# Altium PCB ESP32_C3.PcbDoc
Units mil, origin at the board's own origin, x right, y up, seen from the top; angles counter-clockwise.
Board outline 3005 x 2225 mil, 2 copper layers (Top Layer, Bottom Layer); 64 components, 42 nets, 260 pads, 0 vias.
Unrouted connection lines stored in the file: 191.
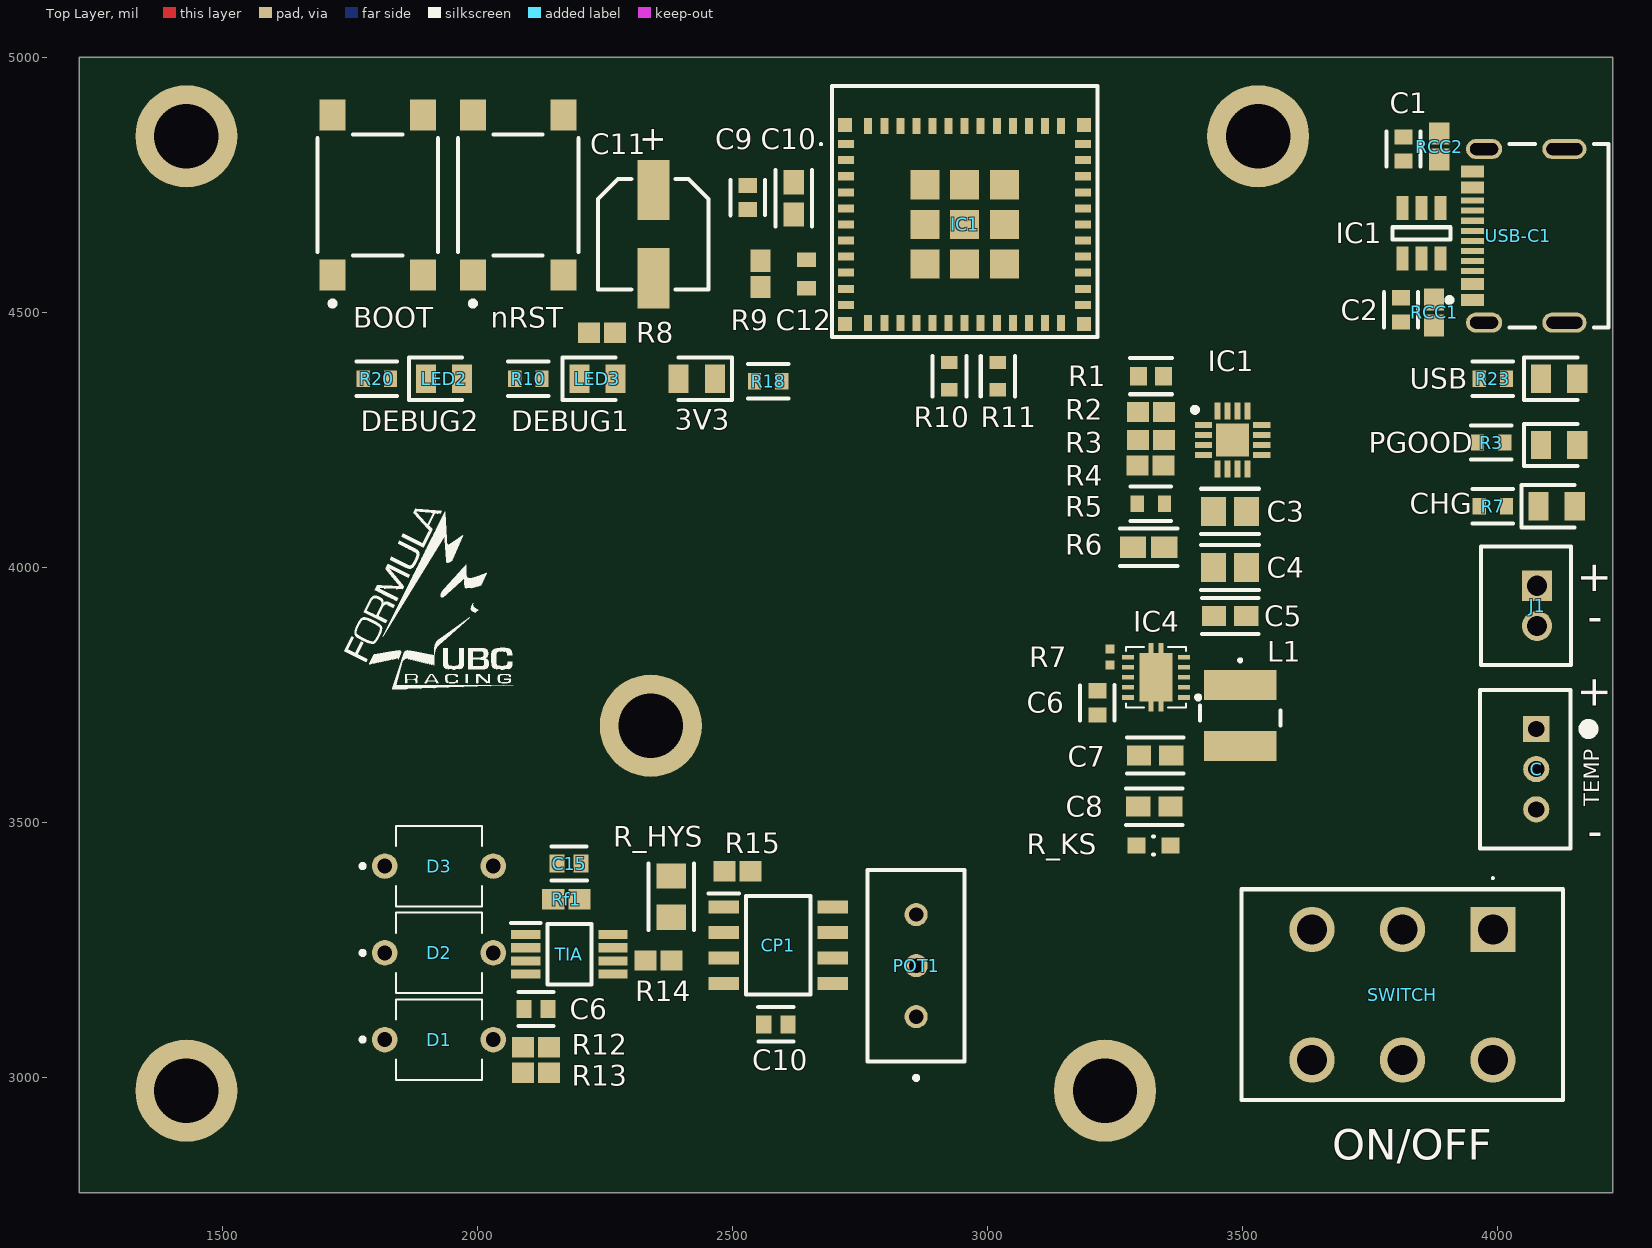
[diagram p0: Top Layer view]
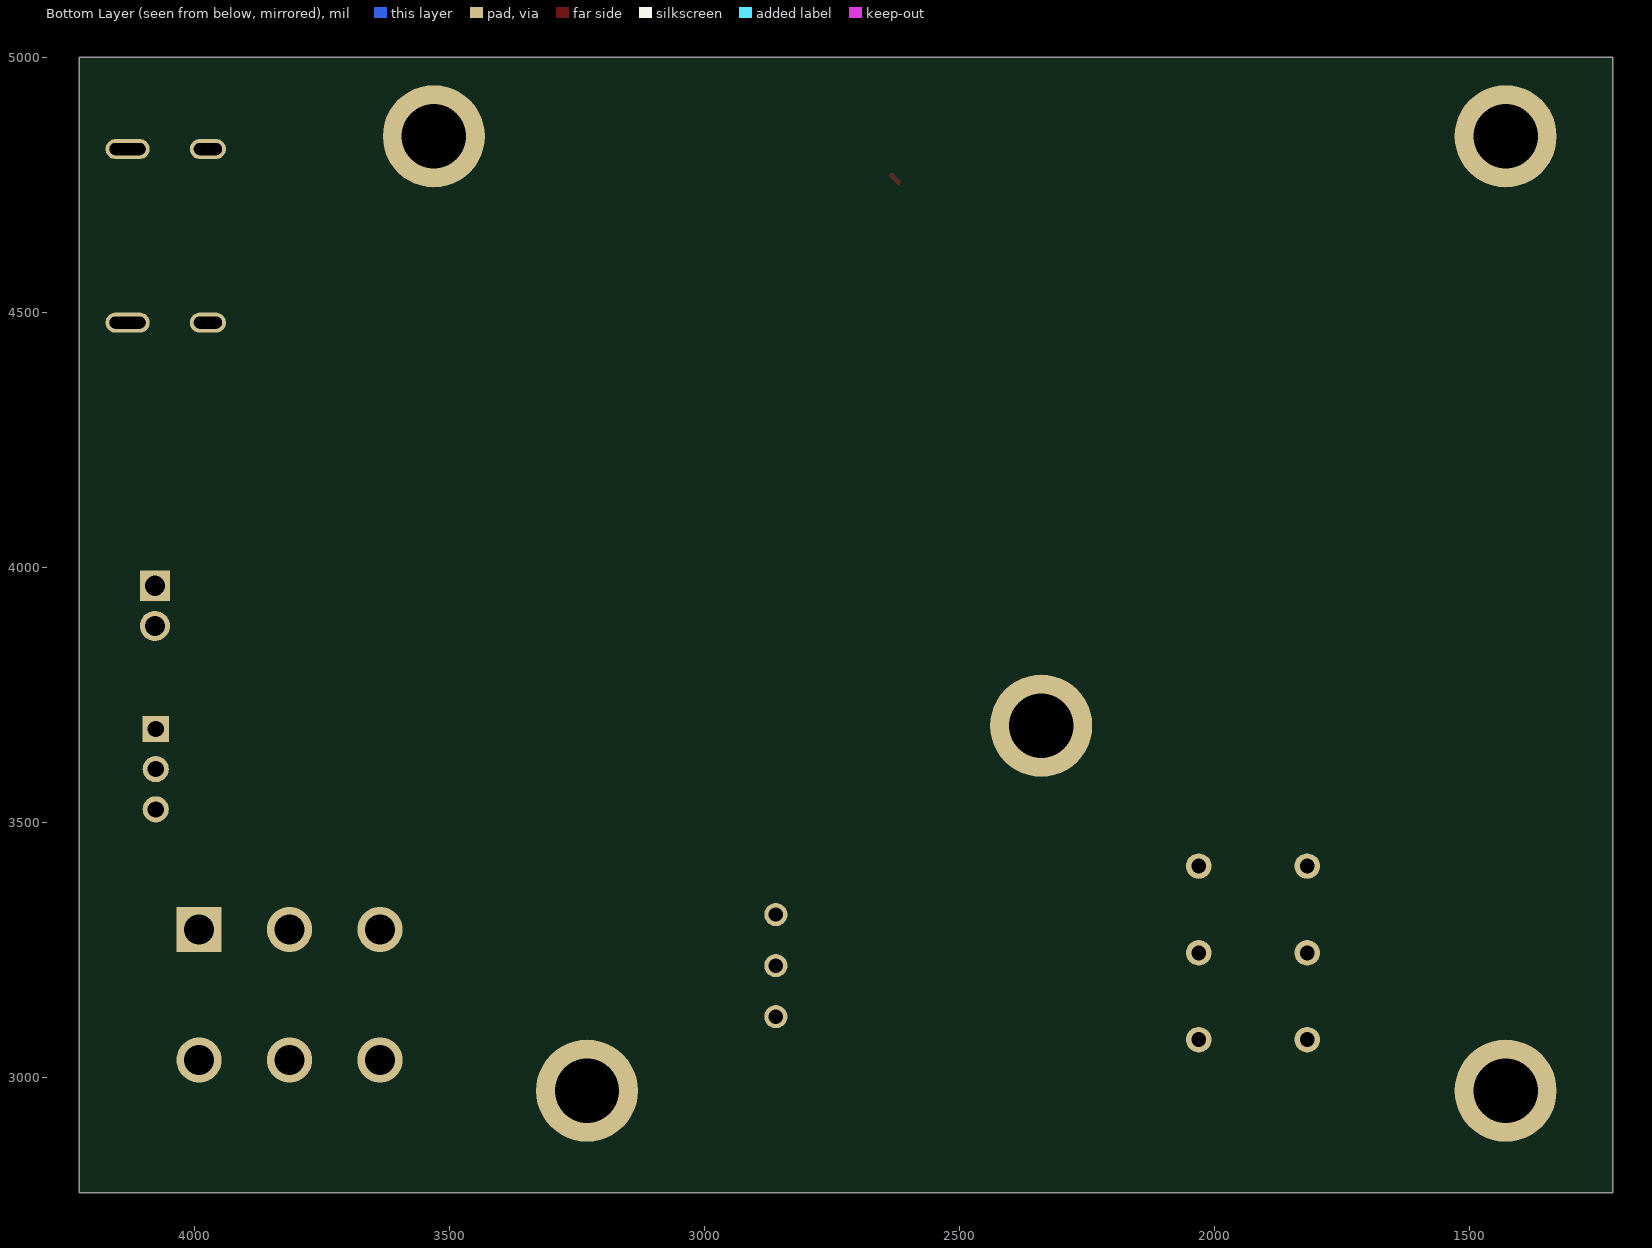
[diagram p1: Bottom Layer view, seen from below]

## Layer stack, top to bottom
Top Solder: solder mask 0.4, Solder Resist, Dk 3.5
Top Layer: signal copper 1.4
Dielectric 1: dielectric 12.6, FR-4, Dk 4.8
Bottom Layer: signal copper 1.4
Bottom Solder: solder mask 0.4, Solder Resist, Dk 3.5

## Board outline
1220,2775 4225,2775 4225,5000 1220,5000

## Design rules (kind name [scope] priority, off if disabled: settings)
Clearance [All] p1: gap=5.98 ignorepadtopadclearanceinfootprint=FALSE
DiffPairsRouting [All] p1: maxlimit=10 minlimit=10 mostfreqgap=10 toplayer_minwidth=15 toplayer_maxwidth=15 toplayer_prefwidth=15 bottomlayer_minwidth=15 bottomlayer_maxwidth=15 bottomlayer_prefwidth=15 maxuncoupledlength=500
PolygonConnect [All] p1: connectstyle=Relief reliefconductorwidth=10 reliefentries=4 polygonreliefangle="90 Angle" airgapwidth=10
RoutingVias [All] p1: holewidth=28 width=50 viastyle="Through Hole" minholewidth=28 minwidth=50 maxholewidth=28 maxwidth=50
SolderMaskExpansion [All] p1: expansion=0 istentingtop=FALSE
SupplyNets "Schematic Supply Nets_5" [InNet('3V3')] p1: voltage=0.000
SupplyNets "Schematic Supply Nets_4" [InNet('5V_USB')] p2: voltage=0.000
SupplyNets "Schematic Supply Nets_3" [InNet('VBAT+')] p3: voltage=0.000
SupplyNets "Schematic Supply Nets_2" [InNet('PWR_EN')] p4: voltage=0.000
SupplyNets "Schematic Supply Nets_1" [InNet('V_SYS')] p5: voltage=0.000
SupplyNets "Schematic Supply Nets" [InNet('GND')] p6: voltage=0.000
Width [All] p1: maxlimit=10 minlimit=10 preferedwidth=10
29 further rules are at their usual default settings.

## Classes and differential pairs
component class "Power Management": 3V3 C C1 C4 C5 C6 C8 C9 C11 C12 CHG IC1 IC4 J1 L1 PGOOD R3 R5 R6 R7 R10 R12 R15 R18 R23 R_KS RCC1 RCC2 RT1 SWITCH USB USB-C1
component class "Laser Receiver AFE": C6 C10 C15 CP1 D1 D2 D3 POT1 R12 R14 R15 R_HYS Rf1 TIA
component class "ESP32-C3 MCU": BOOT C9 C10 C11 C12 IC1 LED2 LED3 nRST R8 R10 R12 R20
differential pair USB_D: +USB_D_P -USB_D_N

## Components (designator, comment, footprint, x,y, rotation, side; value= is the part's Value field where it differs from the comment)
3V3 "LTST-C170GKT" LEDC2012X120N 2430,4370 r180 top (schematic designator LED5)
BOOT "PTS645SM43SMTR92LFS" FP-PTS645SM43SMTR92LFS-MFG 1805,4730 r90 top (schematic designator SW2)
C "B3B-PH-K-S(LF)(SN)" JST-B3B-PH-K-S-3_V 4053.35,3605 r270 top (schematic designator P1)
C1 "0.1uF" FP-C0603C-CF-MFG#1 3815,4820 r90 top value="0.10 μF"
C2 "1uF" FP-C0603C-CF-MFG#1 3810,4505 r90 top value="0.10 μF" (schematic designator C4)
C3 "4.7uF" FP-GCM21B-0_2-e0_2_0_7-IPC_B#1 3475,4110 r0 top (schematic designator C5)
C4 "4.7uF" FP-GCM21B-0_2-e0_2_0_7-IPC_B#2 3475,4000 r0 top (schematic designator C8)
C5 "10uF" FP-GRM188-0_1-e0_2_0_55-IPC_A#1 3475,3905 r0 top (schematic designator C13)
C6 "0.1uF" FP-C0603C-CF-MFG#2 3215,3735 r270 top value="0.10 μF" (schematic designator C14)
C6 "0.1uF" FP-C0603C-CF-MFG#1 2115,3135 r180 top value="0.10 μF"
C7 "10uF" FP-GRM188-0_1-e0_2_0_55-IPC_A#1 3328.28,3631.68 r180 top (schematic designator C12)
C8 "10uF" FP-GRM188-0_1-e0_2_0_55-IPC_A#1 3326.71,3531.68 r180 top (schematic designator C9)
C9 "0.1uF" FP-C0603C-CF-MFG#1 2530,4725 r270 top value="0.10 μF" (schematic designator C3)
C10 "10uF" FP-GRM188-0_1-e0_2_0_55-IPC_A#2 2620,4723.43 r270 top (schematic designator C11)
C10 "0.1uF" FP-C0603C-CF-MFG#1 2585,3105 r0 top value="0.10 μF"
C11 "47uF" WCAP-ASLI_D5H5.5 2345,4653.39 r90 top (schematic designator C7)
C12 "1uF" CAPC1608X90N 2645,4575 r90 top (schematic designator C2)
C15 "22pF" FP-C0603C-CF-MFG#1 2180,3420 r0 top value="22 pF"
CHG "LTST-C170GKT" LEDC2012X120N 4115,4120 r0 top (schematic designator LED4)
CP1 "LM393DR2GH" SOIC127P600X175-8N 2590,3260 r0 top
D1 "BPW34" BPW34 1925,3075 r0 top
D2 "BPW34" BPW34 1925,3245 r0 top
D3 "BPW34" BPW34 1925,3415 r0 top
IC1 "USBLC6-2SC6" SOT95P280X145-6N 3850,4655 r270 top (schematic designator IC3)
IC1 "BQ24074RGTR" QFN50P300X300X100-17N-D 3480,4250 r0 top (schematic designator IC2)
IC1 "ESP32-C3-MINI-1U-H4" ESP32C3MINI1UH4 2955,4672.24 r0 top
IC4 "TPS63001DRCR" TPS74901DRCR 3330,3785 r180 top
J1 "B2B-PH-K-S(LF)(SN)" JST-B2B-PH-K-S_V 4055,3925 r270 top
L1 "2.2uH" SRN40262R2Y 3495,3710.04 r270 top
LED2 "LTST-C170GKT" LEDC2012X120N 1935,4370 r0 top
LED3 "LTST-C170GKT" LEDC2012X120N 2235.43,4370 r0 top
nRST "PTS645SM43SMTR92LFS" FP-PTS645SM43SMTR92LFS-MFG 2080,4730 r90 top (schematic designator SW1)
PGOOD "LTST-C170GKT" LEDC2012X120N 4120,4240 r0 top (schematic designator LED1)
POT1 "3296W-1-104LF" 3296W1503LF 2860,3120 r270 top
R1 "1K5" FP-RG1608-IPC_C 3320,4375 r0 top (schematic designator R15)
R2 "46K4" RESC1608X55N#1 3320,4305 r180 top (schematic designator R12)
R3 "3K" RESC1608X55N#1 3320,4250 r180 top (schematic designator R16)
R3 "1K" FP-RC0603-0_55-IPC_C#1 3986.64,4245 r0 top
R4 "1K8" RESC1608X55N#2 3319.41,4200 r180 top (schematic designator R17)
R5 "10K" FP-RC0603-0_55-IPC_C#1 3320,4125 r180 top (schematic designator R14)
R6 "NCP18XH103F03RB" FP-NCP18-0_15-IPC_A 3315.55,4040 r180 top (schematic designator R22)
R7 "100R" RESC1005X40X25LL05T05 3240,3825 r90 top (schematic designator R19)
R7 "1K" FP-RC0603-0_55-IPC_C#1 3990,4120 r0 top
R8 "10kΩ" RESC1608X55N#1 2244.41,4460 r0 top
R9 "10kΩ" RESC1608X55N#1 2555,4575.59 r90 top (schematic designator R1)
R10 "1K" FP-RC0603-0_55-IPC_C#1 2100,4370 r0 top
R10 "10K" FP-RC0603-0_55-IPC_C#2 2925,4375 r90 top (schematic designator R2)
R11 "10K" FP-RC0603-0_55-IPC_C#1 3020,4375 r90 top (schematic designator R9)
R12 "10k" RESC1608X55N#3 2115,3060 r0 top (schematic designator R11)
R13 "10k" RESC1608X55N#4 2115,3010 r0 top (schematic designator Ro1)
R14 "10k" RESC1608X55N#5 2355,3230 r0 top (schematic designator R13)
R15 "10k" RESC1608X55N#6 2510,3405 r0 top (schematic designator R4)
R18 "1K" FP-RC0603-0_55-IPC_C#1 2570,4365 r180 top
R20 "1K" FP-RC0603-0_55-IPC_C#1 1803.36,4370 r180 top
R23 "1K" FP-RC0603-0_55-IPC_C#1 3990,4370 r0 top
R_HYS "1M" FP-RK73H2A-IPC_A 2380,3355 r90 top
R_KS "100K" FP-RC0603-0_55-MFG 3325,3455 r180 top
RCC1 "5.1kΩ" RESC1608X55N#1 3875,4500 r270 top
RCC2 "5.1kΩ" RESC1608X55N#1 3885,4825 r90 top
Rf1 "10k" RESC1608X55N#1 2174.41,3350 r0 top
SWITCH "SLW-1678105-6A-N-D" SLW16781056AND 3990,3290.91 r180 top
TIA "OPA380AIDGKR" SOP65P490X110-8N 2180.63,3242.2 r0 top
USB "LTST-C170GKT" LEDC2012X120N 4120,4370 r0 top (schematic designator LED6)
USB-C1 "217179-0001" FP-2171790001-MFG 4085,4650 r90 top

## Footprints (in the part's own frame and the unit in brackets; to place one, negate y for a bottom-side part, rotate by r counter-clockwise, add the part's x,y. Pads: shape width x height; smd on the part's side, far side on the other; paste and mask are expansions set on the pad)
3296W1503LF [mm]
  round 1.15 hole 0.71: 1(0,0) 2(-2.54,0) 3(-5.08,0)
  silkscreen extent -7.3,-2.42 3.15,2.41, body extent -7.3,-2.41 2.22,2.41, height 11.54
BPW34 [mm]
  round 1.269 hole 0.74: 1(-2.7,0) 2(2.7,0)
  silkscreen extent -3.9,-2 2.15,2, body extent -2.77,-1.99 2.89,1.99, height 2.34
CAPC1608X90N [mm]
  rect 0.73x0.94 smd: 2(0.71,0) C12(-0.71,0)
  body extent -0.8,-0.4 0.8,0.4, height 0.9
ESP32C3MINI1UH4 [mm]
  rect 0.8x0.4 smd: 1(-5.9,4) 2(-5.9,3.2) 3(-5.9,2.4) 4(-5.9,1.6) 5(-5.9,0.8) 6(-5.9,0) 7(-5.9,-0.8) 8(-5.9,-1.6) 9(-5.9,-2.4) 10(-5.9,-3.2) 11(-5.9,-4) 25(5.9,-4) 26(5.9,-3.2) 27(5.9,-2.4) 28(5.9,-1.6) 29(5.9,-0.8) 30(5.9,0) 31(5.9,0.8) 32(5.9,1.6) 33(5.9,2.4) 34(5.9,3.2) 35(5.9,4)
  rect 0.4x0.8 smd: 12(-4.8,-4.9) 13(-4,-4.9) 14(-3.2,-4.9) 15(-2.4,-4.9) 16(-1.6,-4.9) 17(-0.8,-4.9) 18(0,-4.9) 19(0.8,-4.9) 20(1.6,-4.9) 21(2.4,-4.9) 22(3.2,-4.9) 23(4,-4.9) 24(4.8,-4.9) 36(4.8,4.9) 37(4,4.9) 38(3.2,4.9) 39(2.4,4.9) 40(1.6,4.9) 41(0.8,4.9) 42(0,4.9) 43(-0.8,4.9) 44(-1.6,4.9) 45(-2.4,4.9) 46(-3.2,4.9) 47(-4,4.9) 48(-4.8,4.9)
  rect 1.45x1.45 smd: 49(0,0) 54(-1.975,1.975) 55(-1.975,0) 56(-1.975,-1.975) 57(0,-1.975) 58(1.975,-1.975) 59(1.975,0) 60(1.975,1.975) 61(0,1.975)
  rect 0.7x0.7 smd: 50(5.95,4.95) 51(5.95,-4.95) 52(-5.95,-4.95) 53(-5.95,4.95)
  silkscreen extent -7.2,-5.6 6.6,6.9, body extent -6.6,-5.6 6.6,6.9, height 2.4
FP-2171790001-MFG [mm]
  rrect100% 1x1.8 hole 1.4 slot 0.6 at 0 deg paste-2539.97 mask+0: 1(-4.32,2.85) 2(4.32,2.85)
  rrect100% 1x2.2 hole 1.8 slot 0.6 at 0 deg paste-2539.97 mask+0: 3(-4.32,-1.15) 4(4.32,-1.15)
  rect 0.6x1.15 smd paste+0 mask+0: A1-B12(-3.2,3.425) A4-B9(-2.4,3.425) B1-A12(3.2,3.425) B4-A9(2.4,3.425)
  rect 0.3x1.15 smd paste+0 mask+0: A5(-1.25,3.425) A6(-0.25,3.425) A7(0.25,3.425) A8(1.25,3.425) B5(1.75,3.425) B6(0.75,3.425) B7(-0.75,3.425) B8(-1.75,3.425)
  silkscreen extent -4.57,-3.35 4.57,4.7, body extent -4.92,-3.45 4.92,4.1, height 0.25
FP-C0603C-CF-MFG#1 [mm]
  rect 0.75x0.9 smd paste+0 mask+0: 1(-0.6,0) 2(0.6,0)
  silkscreen extent -0.87,-0.85 0.88,0.85, body extent -1.2,-0.6 1.2,0.6, height 0.25
FP-C0603C-CF-MFG#2 [mm]
  rect 0.75x0.9 smd paste+0 mask+0: 2(0.6,0) C6(-0.6,0)
  silkscreen extent -0.87,-0.85 0.88,0.85, body extent -1.2,-0.6 1.2,0.6, height 0.25
FP-GCM21B-0_2-e0_2_0_7-IPC_B#1 [mil]
  rect 49.4x57.33 smd paste+0 mask+0: 1(-32.51,0) C3(32.51,0)
  silkscreen extent -57,-44 57,44, body extent -67,-39 67,39, height 10
FP-GCM21B-0_2-e0_2_0_7-IPC_B#2 [mil]
  rect 49.4x57.33 smd paste+0 mask+0: 1(-32.51,0) 2(32.51,0)
  silkscreen extent -57,-44 57,44, body extent -67,-39 67,39, height 10
FP-GRM188-0_1-e0_2_0_55-IPC_A#1 [mil]
  rect 47.57x39.85 smd paste+0 mask+0: 1(-31.57,0) 2(31.57,0)
  silkscreen extent -55,-36 55,36, body extent -75,-40 75,40, height 10
FP-GRM188-0_1-e0_2_0_55-IPC_A#2 [mil]
  rect 47.57x39.85 smd paste+0 mask+0: 2(31.57,0) C10(-31.57,0)
  silkscreen extent -55,-36 55,36, body extent -75,-40 75,40, height 10
FP-NCP18-0_15-IPC_A [mil]
  rect 51.42x41.66 smd paste+0 mask+0: 2(30.55,0) R6(-30.55,0)
  silkscreen extent -56,-37 56,37, body extent -76,-41 76,41, height 10
FP-PTS645SM43SMTR92LFS-MFG [mm]
  rect 1.55x1.3 smd paste+0 mask+0: 1(-3.975,2.25) 2(3.975,2.25) 3(-3.975,-2.25) 4(3.975,-2.25)
  silkscreen extent -5.52,-3 3,3, body extent -4.85,-3.1 4.85,3.1, height 0.25
FP-RC0603-0_55-IPC_C#1 [mil]
  rect 25.93x31.97 smd paste+0 mask+0: 1(-26.64,0) 2(26.64,0)
  silkscreen extent -40,-33 40,33, body extent -44,-22 44,22, height 10
FP-RC0603-0_55-IPC_C#2 [mil]
  rect 25.93x31.97 smd paste+0 mask+0: 2(26.64,0) R10(-26.64,0)
  silkscreen extent -40,-33 40,33, body extent -44,-22 44,22, height 10
FP-RC0603-0_55-MFG [mm]
  rect 0.9x0.8 smd paste+0 mask+0: 1(-0.85,0) 2(0.85,0)
  silkscreen extent -0.02,-0.45 0.02,0.45, body extent -1.4,-0.55 1.4,0.55, height 0.25
FP-RG1608-IPC_C [mil]
  rect 33.66x35.68 smd paste+0 mask+0: 1(-24.63,0) 2(24.63,0)
  silkscreen extent -41,-35 41,35, body extent -45,-24 45,24, height 10
FP-RK73H2A-IPC_A [mil]
  rect 49.42x57.56 smd paste+0 mask+0: 1(-40.37,0) 2(40.37,0)
  silkscreen extent -65,-45 65,45, body extent -85,-48 85,48, height 10
JST-B2B-PH-K-S_V [mm] "Connector, 2-Leads, Body 5.9x4.5mm, Pitch 2mm"
  rect 1.5x1.5 hole 1: 1(-1,0.55)
  round 1.5 hole 1: 2(1,0.55)
  silkscreen extent -2.95,-2.25 2.95,2.25, body extent -2.95,-2.25 2.95,2.25, height 6
JST-B3B-PH-K-S-3_V [mm] "Connector, 3-Leads, Body 7.9x4.5mm, Pitch 2mm"
  rect 1.3x1.3 hole 0.8: 1(-2,0.55)
  round 1.3 hole 0.8: 2(0,0.55) 3(2,0.55)
  silkscreen extent -3.95,-2.25 3.95,3.4, body extent -3.95,-2.25 3.95,2.25, height 6
LEDC2012X120N [mm]
  rect 1x1.4 smd: 1(-0.9,0) 2(0.9,0)
  silkscreen extent -1.75,-1.05 0.9,1.05, body extent -1.03,-0.63 0.97,0.63, height 1.2
QFN50P300X300X100-17N-D [mm]
  rect 0.85x0.3 smd: 1(-1.45,0.75) 2(-1.45,0.25) 3(-1.45,-0.25) 4(-1.45,-0.75) 9(1.45,-0.75) 10(1.45,-0.25) 11(1.45,0.25) 12(1.45,0.75)
  rect 0.3x0.85 smd: 5(-0.75,-1.45) 6(-0.25,-1.45) 7(0.25,-1.45) 8(0.75,-1.45) 13(0.75,1.45) 14(0.25,1.45) 15(-0.25,1.45) 16(-0.75,1.45)
  rect 1.65x1.65 smd: IC1(0,0)
  silkscreen extent -2,1.38 -1.75,1.62, body extent -1.5,-1.5 1.5,1.5, height 1
RESC1005X40X25LL05T05 [mm] "Chip Resistor, 2-Leads, Body 1.05x0.55mm, IPC High Density"
  rect 0.45x0.45 smd: 1(-0.4,0) 2(0.4,0)
  body extent -0.53,-0.28 0.53,0.28, height 0.4
RESC1608X55N#1 [mm]
  rect 1.1x1 smd: 1(-0.65,0) 2(0.65,0)
  body extent -0.8,-0.4 0.8,0.4, height 0.55
RESC1608X55N#2 [mm]
  rect 1.1x1 smd: 2(0.65,0) R4(-0.65,0)
  body extent -0.8,-0.4 0.8,0.4, height 0.55
RESC1608X55N#3 [mm]
  rect 1.1x1 smd: 1(-0.65,0) R14(0.65,0)
  body extent -0.8,-0.4 0.8,0.4, height 0.55
RESC1608X55N#4 [mm]
  rect 1.1x1 smd: 1(-0.65,0) R13(0.65,0)
  body extent -0.8,-0.4 0.8,0.4, height 0.55
RESC1608X55N#5 [mm]
  rect 1.1x1 smd: 2(0.65,0) R14(-0.65,0)
  body extent -0.8,-0.4 0.8,0.4, height 0.55
RESC1608X55N#6 [mm]
  rect 1.1x1 smd: 2(0.65,0) R15(-0.65,0)
  body extent -0.8,-0.4 0.8,0.4, height 0.55
SLW16781056AND [mm]
  rect 2.25x2.25 hole 1.5: 1(0,0)
  round 2.25 hole 1.5: 2(4.5,0) 3(9,0) 4(9,6.5) 5(4.5,6.5) 6(0,6.5)
  silkscreen extent -3.5,-2.6 12.5,8.5, body extent -3.43,-1.52 12.57,8.98, height 13.82
SOIC127P600X175-8N [mm]
  rect 1.525x0.65 smd: 1(-2.712,1.905) 2(-2.712,0.635) 3(-2.712,-0.635) 4(-2.712,-1.905) 5(2.712,-1.905) 6(2.712,-0.635) 7(2.712,0.635) 8(2.712,1.905)
  silkscreen extent -3.47,-2.45 1.6,2.58, body extent -3,-2.45 3,2.45, height 1.75
SOP65P490X110-8N [mm]
  rect 1.45x0.45 smd: 1(-2.175,0.975) 2(-2.175,0.325) 3(-2.175,-0.325) 4(-2.175,-0.975) 5(2.175,-0.975) 6(2.175,-0.325) 7(2.175,0.325) 8(2.175,0.975)
  silkscreen extent -2.9,-1.5 1.1,1.55, body extent -2.45,-1.5 2.45,1.5, height 1.1
SOT95P280X145-6N [mm]
  rect 1.2x0.6 smd: 1(-1.25,0.95) 2(-1.25,0) 3(-1.25,-0.95) 4(1.25,-0.95) 5(1.25,0) 6(1.25,0.95)
  silkscreen extent -0.3,-1.45 0.3,1.45, body extent -1.4,-1.45 1.4,1.45, height 1.2
SRN40262R2Y [mm]
  rect 1.5x3.6 smd: 1(-1.525,0) 2(1.525,0)
  silkscreen extent -2.8,-2 0.5,2, body extent -2.12,-2 2.12,2, height 2.6
TPS74901DRCR [mm]
  rect 0.6x0.24 smd: 1(-1.4,1) 2(-1.4,0.5) 3(-1.4,0) 4(-1.4,-0.5) 5(-1.4,-1) 6(1.4,-1) 7(1.4,-0.5) 8(1.4,0) 9(1.4,0.5) 10(1.4,1)
  rect 1.65x2.4 smd: 11(0,0)
  rect 0.25x0.5 smd: 12(-0.25,1.45) 13(0.25,1.45) 14(-0.25,-1.45) 15(0.25,-1.45)
  silkscreen extent -2.2,-1.5 1.5,1.5, body extent -1.5,-1.5 1.5,1.5, height 1
WCAP-ASLI_D5H5.5 [mm] "Aluminium Electrolytic V-Chip SMT Capacitors, 5x5.5mm"
  rect 3x1.6 smd: 1(2.2,0) 2(-2.2,0)
  silkscreen extent -2.75,-2.75 2.75,2.75, body extent -3,-2.65 3,2.65, height 5.5

## Part data
3V3 CHG LED2 LED3 PGOOD USB: "LED", Manufacturer_Name=Lite-On, Mouser Part Number=859-LTST-C170GKT, Arrow Part Number=LTST-C170GKT, Arrow Price/Stock=https://www.arrow.com/en/products/ltst-c170gkt/lite-on-technology?utm_currency=USD&region=europe, Datasheet Link=https://mm.digikey.com/Volume0/opasdata/d220001/medias/docus/895/LTST-C170GKT.pdf, Height=1.2mm, Manufacturer_Part_Number=LTST-C170GKT, Mouser Price/Stock=https://www.mouser.co.uk/ProductDetail/LITEON/LTST-C170GKT?qs=%2FSqKn2EfXQSV5aRij3YIfQ%3D%3D
BOOT nRST: library part CMP-2000-05160-2, "SWITCH TACTILE SPST-NO 0.05A 12V", Case/Package=SMD/SMT, Color=Black, Contact Resistance=100mR, Current Rating=50mA, Max Operating Temperature=60°C, Max Voltage Rating (DC)=12V, Min Operating Temperature=-20°C, Operating Force=160gf, Package Quantity=1, Actuator Length=0.85mm, Actuator Material=Nylon, Actuator Type=Standard, Contact Material=Silver, Contact Plating=Silver, Depth=9mm, Illumination Type=Non-Illuminated, Lead Free="Lead Free", Length=6mm, Max Current Rating=50mA, Mechanical Life=100000Cycles, Mount="Surface Mount", Orientation=Straight, Packaging="Tape and Reel", REACH SVHC="No SVHC", Switch Function=Off-Mom, Termination="Gull Wing", Throw Configuration=SPST, Voltage Rating (DC)=12V
C: library part CMP-2000-05164-1, "Male Header, Pitch 2 mm, 1 x 3 Position, Height 6 mm, Tail Length 3.4 mm, -25 to 85 degC, RoHS, Bulk", Manufacturer=JST, Datasheet URL=https://datasheet.ciiva.com/11746/0900766b80826550-11746939.pdf, Datasheet Version=Oct-06, Manufacturer URL=http://www.jst.com/home2.html, No of Positions=3, Pitch=2mm, Style/Orientation=StraightHeader/Plug, Termination=Crimp, Type=ShroudedHeader
C1 C2 C6 C6 C9 C10: library part CMP-2006-03061-2, "CAP CER 0.1UF 50V X7R 0603", Capacitance="0.10 μF", Manufacturer=KEMET, Manufacturer Part Number=C0603C104K5RACTU, Package=C0603C-CF, Temperature="-55°C to +125°C", Temperature Characteristic=X7R, Temperature Coefficient=30ppm/°C, Temperature Range High=+125°C, Temperature Range Low=-55°C, Tolerance=0.1, Voltage Rating="50 V", Automotive=Yes, Automotive Grade="Grade 1", Category=Cap, ComponentLink2Description=Datasheet, ComponentLink2URL=https://api.kemet.com/component-edge/download/datasheet/C0603C100J5GACAUTO.pdf, Device Class L1="Passive Components", Device Class L2=Capacitors, Device Class L3="Ceramic Capacitors", Digikey Description="CAP CER 0.1UF 50V X7R 0603", Height=0.87mm, Lead Free=Yes, Material=Ceramic, Octopart=https://octopart.com/c0603c104k5ractu-kemet-139244, RoHS=TRUE
C3 C4: library part CMP-06035-045423-1, "Ceramic Capacitor for Automotive 4.7uF ±10% 25VDC X7S 0805 Embossed T/R"
C5 C7 C8 C10: library part CMP-2006-02792-2, "Chip Multilayer Ceramic Capacitors for General Purpose, 0603, 10uF, X5R, 15%, 20%, 6.3V", Case Code (Imperial)=0603, Case Code (Metric)=1608, Dielectric=X5R, Max Operating Temperature=85°C, Min Operating Temperature=-55°C, Package Quantity=4000, Tolerance=20%, Voltage=6.3V, Capacitance=10uF, Case/Package=0603, Depth=0.8mm, Height=0.8mm, Lead Free="Lead Free", Length=1.6mm, Material=Ceramic, Mount="Surface Mount", Packaging="Tape and Reel", Radiation Hardening=No, REACH SVHC="No SVHC", Termination=SMD/SMT, Thickness=0.035inch, Voltage Rating=6.3V, Voltage Rating (DC)=6.3V, Width=0.031inch
C11: library part CMP-03913-53914570-2, "WCAP-ASLI Aluminum Electrolytic Capacitors", Capacitance=47µF, Case/Package=Radial, ESR (Equivalent Series Resistance)=832.685mΩ, Insulation Resistance=2.12766MΩ, Leakage Current=7.52µA, Max Operating Temperature=105°C, Min Operating Temperature=-55°C, Ripple Current=195mA, Tolerance=20%, Voltage Rating=16V, Diameter=5mm, Height=5.5mm, Height - Seated (Max)=5.5118mm, Impedance=1.05Ω, Length=5.5mm, Life (Hours)=2000hours, Mount="Surface Mount", Polarity=Polar, REACH SVHC=Unknown, Ripple Current (AC)=195mA, RoHS=Compliant, Voltage Rating (DC)=16V, Width=5.3mm
C12: library part CL10B105KP8NNNC, "Capacitor", Manufacturer_Name=SAMSUNG, Mouser Part Number=187-CL10B105KP8NNNC, Arrow Part Number=CL10B105KP8NNNC, Arrow Price/Stock=https://www.arrow.com/en/products/cl10b105kp8nnnc/samsung-electro-mechanics?utm_currency=USD&region=nac, Datasheet Link=https://media.digikey.com/pdf/Data%20Sheets/Samsung%20PDFs/CL_Series_MLCC_ds.pdf, Height=0.9mm, Manufacturer_Part_Number=CL10B105KP8NNNC, Mouser Price/Stock=https://www.mouser.co.uk/ProductDetail/Samsung-Electro-Mechanics/CL10B105KP8NNNC?qs=X6jEic%2FHinD9krOsbkFZow%3D%3D
C15: library part CMP-2006-03119-3, "Cap Ceramic 22pF 50V C0G 5% SMD 0603 125°C Paper T/R", Capacitance="22 pF", Manufacturer=KEMET, Manufacturer Part Number=C0603C220J5GACTU, Package=C0603C-CF, Temperature="-55°C to +125°C", Temperature Characteristic=C0G, Temperature Coefficient=30ppm/°C, Temperature Range High=+125°C, Temperature Range Low=-55°C, Tolerance=0.05, Voltage Rating="50 V", Automotive=Yes, Automotive Grade="Grade 1", Category=Cap, ComponentLink2Description=Datasheet, ComponentLink2URL=https://api.kemet.com/component-edge/download/datasheet/C0603C100J5GACAUTO.pdf, Device Class L1="Passive Components", Device Class L2=Capacitors, Device Class L3="Ceramic Capacitors", Digikey Description="Cap Ceramic 22pF 50V C0G 5% SMD 0603 125°C Paper T/R", Height=0.87mm, Lead Free=Yes, Material=Ceramic, Mouser Description="Cap Ceramic 22pF 50V C0G 5% SMD 0603 125°C Paper T/R", Octopart=https://octopart.com/c0603c220j5gactu-kemet-98525, RoHS=TRUE
CP1: "Integrated Circuit", Manufacturer_Name=onsemi, Mouser Part Number=863-LM393DR2GH, Arrow Part Number=LM393DR2GH, Arrow Price/Stock=https://www.arrow.com/en/products/lm393dr2gh/on-semiconductor?region=nac, Datasheet Link=https://www.arrow.com/en/products/lm393dr2gh/on-semiconductor, Height=1.75mm, Manufacturer_Part_Number=LM393DR2GH, Mouser Price/Stock=https://www.mouser.co.uk/ProductDetail/onsemi/LM393DR2GH?qs=VZGfJwuufXYqyz8qorfXHA%3D%3D
D1 D2 D3: "Diode", Manufacturer_Name="ams OSRAM", Mouser Part Number=N/A, Arrow Part Number=BPW34, Arrow Price/Stock=https://www.arrow.com/en/products/bpw34/osram-opto-semiconductors?region=europe, Datasheet Link=https://datasheet.datasheetarchive.com/originals/distributors/Datasheets-24/DSA-465527.pdf, Height=2.2mm, Manufacturer_Part_Number=BPW34, Mouser Price/Stock=https://www.mouser.com/Search/Refine.aspx?Keyword=N%2FA
IC1: "Integrated Circuit", Manufacturer_Name=STMicroelectronics, Mouser Part Number=511-USBLC6-2SC6, Arrow Part Number=USBLC6-2SC6, Arrow Price/Stock=https://www.arrow.com/en/products/usblc6-2sc6/stmicroelectronics.html?utm_currency=USD&region=nac, Datasheet Link=https://www.st.com/resource/en/datasheet/usblc6-2.pdf, Height=1.45mm, Manufacturer_Part_Number=USBLC6-2SC6, Mouser Price/Stock=https://www.mouser.co.uk/ProductDetail/STMicroelectronics/USBLC6-2SC6?qs=po45yt2pPpu%2FhNIlwQdTlg%3D%3D
IC1: "Integrated Circuit", Manufacturer_Name="Texas Instruments", Mouser Part Number=595-BQ24074RGTR, Arrow Part Number=BQ24074RGTR, Arrow Price/Stock=https://www.arrow.com/en/products/bq24074rgtr/texas-instruments?utm_currency=USD&region=nac, Datasheet Link=http://www.ti.com/lit/ds/symlink/bq24074.pdf, Height=1mm, Manufacturer_Part_Number=BQ24074RGTR, Mouser Price/Stock=https://www.mouser.co.uk/ProductDetail/Texas-Instruments/BQ24074RGTR?qs=ZV%2Fxhq4oszp2Nll7fIx5wg%3D%3D
IC1: "Integrated Circuit", Manufacturer_Name="Espressif Systems", Mouser Part Number=356-ESP32-C3MINI1UH4, Datasheet Link=https://www.espressif.com/sites/default/files/documentation/esp32-c3-mini-1_datasheet_en.pdf, Height=2.55mm, Manufacturer_Part_Number=ESP32-C3-MINI-1U-H4, Mouser Price/Stock=https://www.mouser.co.uk/ProductDetail/Espressif-Systems/ESP32-C3-MINI-1U-H4?qs=pBJMDPsKWf1ZgoQcnZrrOA%3D%3D
IC4: "Integrated Circuit", Manufacturer_Name="Texas Instruments", Mouser Part Number=595-TPS63001DRCR, Arrow Part Number=TPS63001DRCR, Arrow Price/Stock=https://www.arrow.com/en/products/tps63001drcr/texas-instruments.html?utm_currency=USD&region=nac, Datasheet Link=https://www.ti.com/lit/ds/symlink/tps63001.pdf?ts=1616520267195&ref_url=https%253A%252F%252Fwww.ti.com%252Fstore%252Fti%252Fen%252Fp%252Fproduct%252F%253Fp%253DTPS63001DRCT, Manufacturer_Part_Number=TPS63001DRCR, Mouser Price/Stock=https://www.mouser.co.uk/ProductDetail/Texas-Instruments/TPS63001DRCR?qs=QZuYiDxzHagn01UZf%2F%252B1Bw%3D%3D
J1: library part CMP-2000-05162-1, "Male Header, Pitch 2 mm, 1 x 2 Position, Height 6 mm, Tail Length 3.4 mm, -25 to 85 degC, RoHS, Bulk", Manufacturer=JST, Datasheet URL=http://datasheet.octopart.com/B2B-PH-K-S%28LF%29%28SN%29-JST-datasheet-8324864.pdf, Datasheet Version=Nov-08, Manufacturer URL=http://www.jst.com/home2.html, No of Positions=2, Pitch=2mm, Style/Orientation=StraightHeader/Plug, Termination=Crimp, Type=ShroudedHeader
L1: library part SRN4026-2R2Y, "Inductor", Manufacturer_Name=Bourns, Mouser Part Number=652-SRN4026-2R2Y, Arrow Part Number=SRN4026-2R2Y, Arrow Price/Stock=https://www.arrow.com/en/products/srn4026-2r2y/bourns, Datasheet Link=https://componentsearchengine.com/Datasheets/2/SRN4026-2R2Y.pdf, Height=2.5mm, Manufacturer_Part_Number=SRN4026-2R2Y, Mouser Price/Stock=https://www.mouser.co.uk/ProductDetail/Bourns/SRN4026-2R2Y?qs=U0ECReq1GB8v4mx5TYzVlA%3D%3D
POT1: "Variable Resistor", Manufacturer_Name=Bourns, Mouser Part Number=652-3296W-1-104LF, Arrow Part Number=3296W-1-104LF, Arrow Price/Stock=https://www.arrow.com/en/products/3296w-1-104lf/bourns?utm_currency=USD&region=europe, Datasheet Link=https://datasheet.datasheetarchive.com/originals/distributors/Datasheets-10/DSA-187647.pdf, Height=10.28mm, Manufacturer_Part_Number=3296W-1-104LF, Mouser Price/Stock=https://www.mouser.co.uk/ProductDetail/Bourns/3296W-1-104LF?qs=NxuKWO2Bm4Yv9t2iisRb6w%3D%3D
R1: library part CMP-2000-02041-3, "Automotive Metal Thin Film Chip Resistor, 0603, 1.5kΩ, 0.1%, 25ppm/°C, 0.1W, 100V", Case Code (Imperial)=0603, Case Code (Metric)=1608, Max Operating Temperature=155°C, Max Power Dissipation=100mW, Min Operating Temperature=-55°C, Resistance=1.5kR, Resistor Type="Thin Film", Temperature Coefficient=25ppm/°C, Tolerance=0.1%, Voltage Rating=100V, Voltage Rating (DC)=75V, Case/Package=0603, Features="Automotive AEC-Q200", Height=0.4mm, Lead Free="Lead Free", Length=1.6mm, Number of Terminations=2, Packaging="Tape and Reel", Power Rating=100mW, RoHS Compliant=Yes, Series=RG, Size Code=0603, Termination=SMD/SMT, Weight=7.1E-05oz, Width=0.8mm
R2: library part RC0603FR-0746K4L, "Resistor", Manufacturer_Name="Yageo Group", Mouser Part Number=603-RC0603FR-0746K4L, Datasheet Link=http://www.yageo.com/documents/recent/PYu-RC0603_51_RoHS_L_v5.pdf, Height=0.55mm, Manufacturer_Part_Number=RC0603FR-0746K4L, Mouser Price/Stock=https://www.mouser.com/Search/Refine.aspx?Keyword=603-RC0603FR-0746K4L
R3: library part RMCF0603FT3K00, "Resistor", Manufacturer_Name="Stackpole Electronics", Datasheet Link=https://www.seielect.com/Catalog/SEI-RMCF_RMCP.pdf, Height=0.55mm, Manufacturer_Part_Number=RMCF0603FT3K00
R3 R7 R10 R18 R20 R23: library part CMP-1659-00009-5, "RES 1K OHM 1% 1/10W 0603", Case Code (Imperial)=0603, Case Code (Metric)=1608, Max Operating Temperature=155°C, Max Power Dissipation=100mW, Min Operating Temperature=-55°C, Resistance=1kR, Resistance Tolerance=1%, Resistor Type="Thick Film", Temperature Coefficient=100ppm/°C, Voltage Rating=50V, Case/Package=0603, Construction=Rectangular, Contact Plating=Tin, Depth=0.8mm, Features="Moisture Resistant", Height=0.45mm, Lead Free="Lead Free", Length=1.6mm, Military Standard=Not, Number of Terminations=2, Packaging="Tape and Reel", Power Rating=100mW, Radiation Hardening=No, REACH SVHC="No SVHC", RoHS Compliant=Yes, Series=RC, Size Code=0603, Technology="THICK FILM", Termination=SMD/SMT, Tolerance=1%
R4: library part ERJ-3EKF1801V, "Resistor", Manufacturer_Name=Panasonic, Mouser Part Number=667-ERJ-3EKF1801V, Arrow Part Number=ERJ-3EKF1801V, Arrow Price/Stock=https://www.arrow.com/en/products/erj-3ekf1801v/panasonic, Datasheet Link=http://industrial.panasonic.com/cdbs/www-data/pdf/RDA0000/AOA0000C86.pdf, Height=0.55mm, Manufacturer_Part_Number=ERJ-3EKF1801V, Mouser Price/Stock=https://www.mouser.co.uk/ProductDetail/Panasonic/ERJ-3EKF1801V?qs=iBwFsHVUAOdk%252B%252BXuBa6wCQ%3D%3D
R5 R10 R11: library part CMP-2100-03664-2, "RES 10K OHM 1% 1/10W 0603", Case Code (Imperial)=0603, Case Code (Metric)=1608, Max Operating Temperature=155°C, Max Power Dissipation=100mW, Min Operating Temperature=-55°C, Resistance=10kR, Resistance Tolerance=1%, Resistor Type="Thick Film", Temperature Coefficient=100ppm/°C, Voltage Rating=75V, Voltage Rating (DC)=50V, Case/Package=0603, Construction=Rectangular, Depth=0.8mm, Features="Moisture Resistant", Height=0.45mm, Lead Free="Lead Free", Lead Pitch=0.3mm, Length=1.6mm, Military Standard=Not, Number of Pins=2, Number of Terminations=2, Packaging="Tape and Reel", Power Rating=100mW, RoHS Compliant=Yes, Series=RC, Size Code=0603, Termination=SMD/SMT, Tolerance=1%, Weight=7.1E-05oz, Width=0.8mm
R6: library part CMP-2000-05271-3, "NTC Thermistor for Temperature Sensor, 0603, 10kΩ, 1%, 0.1mA, 5V", Case Code (Imperial)=0603, Case Code (Metric)=1608, Current Rating=310uA, Manufacturer Series=NCP18, Max Operating Temperature=125°C, Max Power Dissipation=100mW, Min Operating Temperature=-40°C, Package Quantity=1, Package Shape=Rectangular, Resistance=10kR, Resistance Tolerance=1%, Accuracy=0.7%, Case/Package=0603, Depth=0.8mm, Height=0.8mm, Lead Free="Lead Free", Length=1.6mm, Mount="Surface Mount", Number of Pins=2, Number of Terminals/Pins=2, Packaging="Tape and Reel", Power Rating=100mW, Radiation Hardening=No, REACH SVHC="No SVHC", RoHS Compliant=Yes, Series=NCP, Terminal Finish=Tin, Terminal Placement=Dual, Termination=SMD/SMT, Thermistor Application="TEMPERATURE COMPENSATION", Tolerance=1%
R7: library part CMP-2000-07451-1, "Chip Resistor, 0 Ohm, 0.1 W, -55 to 155 degC, 0402 (1005 Metric), RoHS, Tape and Reel", Case Code (Imperial)=0402, Case Code (Metric)=1005, Manufacturer=Panasonic, Max Operating Temperature=155degC, Max Power Dissipation=100mW, Min Operating Temperature=-55degC, Package Description="2-Pin Surface Mount Device, Body 1 x 0.5 mm", Package Quantity=1, Package Reference=402, Resistance=0mOhm, Temperature Coefficient=600ppm/��C, Tolerance=5%, Voltage Rating=50V, Case/Package=0402, Composition=ThickFilm, Contact Plating=Tin, Datasheet URL=https://industrial.panasonic.com/cdbs/www-data/pdf/RDA0000/AOA0000C301.pdf, Datasheet Version=03/2015, Depth=0.5mm, Height=0.35mm, Lead Free=LeadFree, Length=1mm, Manufacturer URL=http://www.panasonic.com/, Military Standard=Not, Mount=SurfaceMount, Mounting Technology=SurfaceMount, Number of Terminations=2, Packaging=TapeandReel, Power Rating=100mW, Radiation Hardening=No, REACH SVHC=NoSVHC, RoHSCompliant=True, Termination=SMD/SMT, Voltage Rating (DC)=50V, Width=0.02inch
R8 R9 R12 R13 R14 R15 Rf1: library part RC0603FR0710KL, "Resistor", Manufacturer_Name=KEMET, Arrow Part Number=RC0603FR0710KL, Arrow Price/Stock=https://www.arrow.com/en/products/rc0603fr-0710kl/yageo, Datasheet Link=http://www.yageo.com/documents/recent/PYu-RC0603_51_RoHS_L_v5.pdf, Height=0.55mm, Manufacturer_Part_Number=RC0603FR0710KL
R_HYS: library part CMP-04015-079219-1, "1MΩ ±1% 0.25W Chip Resistor 0805 Thick Film AEC-Q200 Qualified", Case Code (Imperial)=0805, Case Code (Metric)=2012, Max Operating Temperature=155°C, Min Operating Temperature=-55°C, Power Rating=125mW, Resistance=1MR, Resistor Type="Thick Film", Temperature Coefficient=100ppm/°C, Tolerance=1%, Voltage Rating=150V, Case/Package=0805, Construction=Rectangular, Depth=1.25mm, Lead Free="Lead Free", Length=2mm, Military Standard=Not, Packaging="Tape and Reel", Series=RK73H, Termination=SMD/SMT, Voltage Rating (DC)=150V
R_KS: library part CMP-2100-03662-2, "RES SMD 100K OHM 1% 1/10W 0603", Case Code (Imperial)=0603, Case Code (Metric)=1608, Max Operating Temperature=155°C, Max Power Dissipation=100mW, Min Operating Temperature=-55°C, Resistance=100kR, Resistance Tolerance=1%, Resistor Type="Thick Film", Temperature Coefficient=100ppm/°C, Voltage Rating=50V, Working Voltage=75V, Case/Package=0603, Construction=Rectangular, Depth=0.8mm, Features="Moisture Resistant", Height=0.45mm, Lead Free="Lead Free", Length=1.6mm, Military Standard=Not, Number of Pins=2, Number of Terminations=2, Packaging="Tape and Reel", Power Rating=100mW, REACH SVHC="No SVHC", RoHS Compliant=Yes, Series=RC, Technology="THICK FILM", Termination=SMD/SMT, Tolerance=1%, Voltage Rating (DC)=50V, Width=0.8mm
RCC1 RCC2: library part RC0603FR-075K1L, "Resistor", Manufacturer_Name=KEMET, Mouser Part Number=603-RC0603FR-075K1L, Arrow Part Number=RC0603FR-075K1L, Arrow Price/Stock=https://www.arrow.com/en/products/rc0603fr-075k1l/yageo?region=nac, Datasheet Link=http://www.yageo.com/documents/recent/PYu-RC0603_51_RoHS_L_v5.pdf, Height=0.55mm, Manufacturer_Part_Number=RC0603FR-075K1L, Mouser Price/Stock=https://www.mouser.co.uk/ProductDetail/YAGEO/RC0603FR-075K1L?qs=gt6vzsuosg2jUUwxnI2PJQ%3D%3D
SWITCH: "Switch", Manufacturer_Name="Same Sky", Mouser Part Number=179-SLW16781056AND, Arrow Part Number=SLW-1678105-6A-N-D, Arrow Price/Stock=https://www.arrow.com/en/products/slw-1678105-6a-n-d/cui-devices?utm_currency=USD&region=nac, Datasheet Link=https://www.sameskydevices.com/product/resource/SLW-1678105-6A-N-D.pdf, Height=14.5mm, Manufacturer_Part_Number=SLW-1678105-6A-N-D, Mouser Price/Stock=https://www.mouser.co.uk/ProductDetail/Same-Sky/SLW-1678105-6A-N-D?qs=IKkN%2F947nfCWfuHPg7jcWw%3D%3D
TIA: "Undefined or Miscellaneous", Manufacturer_Name="Texas Instruments", Mouser Part Number=595-OPA380AIDGKR, Arrow Part Number=OPA380AIDGKR, Arrow Price/Stock=https://www.arrow.com/en/products/opa380aidgkr/texas-instruments?utm_currency=USD&region=europe, Datasheet Link=http://www.ti.com/general/docs/suppproductinfo.tsp?distId=26&gotoUrl=http%3A%2F%2Fwww.ti.com%2Flit%2Fgpn%2Fopa380, Height=1.1mm, Manufacturer_Part_Number=OPA380AIDGKR, Mouser Price/Stock=https://www.mouser.co.uk/ProductDetail/Texas-Instruments/OPA380AIDGKR?qs=7nS3%252BbEUL6se7xvHvUhv0w%3D%3D
USB-C1: library part CMP-04767-000028-2, "CONN RCP USB2.0 TYP C 24P SMD RA", Current Rating=1.25A, Max Operating Temperature=85°C, Min Operating Temperature=-40°C, Voltage Rating=30V, Contact Material="Gold, Nickel", Gender=Receptacle, Height=3.36mm, NexarPartId=117190526, Number of Contacts=16, USB Standard="USB 2.0"

## Free pads (board coordinates)
  round 200 hole 126: MHTR7(1430,2975) MHTR7(1430,4845) MHTR7(2340,3690) MHTR7(3230,2975) MHTR7(3530,4845)

## Nets (pads, with @x,y where several pads share a name; then routed paths per layer and width w, separated by ;. In a path a pad name is that pad's centre, name@x,y a point inside that pad or via, vN(x,y) a via of type N, cw(c..) or ccw(c..) an arc to the next point about the centre after c; other vN are vias at no path point)
3V3: 3V3.2 C7.1 C8.1 C9.1 C10.C10 C11.1 CHG.2 CP1.6 CP1.8 D1.1 D2.1 D3.1 IC1.3@2722.72,4766.73 IC4.1 IC4.10 PGOOD.2 POT1.3 R8.2 R9.2 R10.R10 R11.1 R13.R13 R15.2 TIA.7 | length 19
  Top Layer w10: C10.C10 C10.C10@2633.43,4768.43
5V_USB: C1.1 C2.2 IC1.5@3850,4605.79 IC1.13@3509.53,4307.09 USB-C1.A4-B9 USB-C1.B4-A9 USB.2
BOOT: BOOT.4 IC1.23
CC1: RCC1.1 USB-C1.A5
CC2: RCC2.1 USB-C1.B5
CHG_ESP: IC1.9@3537.09,4220.47 IC1.20 R7.1@3963.36,4120 R11.2
COMP_P: CP1.3 R14.2 R_HYS.1
DEBUG_LED1: IC1.21 LED3.2
DEBUG_LED2: IC1.22 LED2.2
EN: C12.C12 IC1.8@2722.72,4609.25 nRST.4 R9.1
GND: BOOT.2 C1.2 C2.1 C3.C3 C4.2 C5.2 C6.1 C6.2@3215,3711.38 C7.2 C8.2 C9.2 C10.2 C11.2 C12.2 C.3 CP1.4 CP1.5 IC1.1@2722.72,4829.72 IC1.2@3850,4704.21 IC1.4@3422.91,4220.47 IC1.6@3470.16,4192.91 IC1.8@3509.53,4192.91 IC1.14@2829.02,4479.33 IC1.24 IC1.25 IC1.28 IC1.29 IC1.32 IC1.33 IC1.34 IC1.35 IC1.36 IC1.37 IC1.38 IC1.39 IC1.40 IC1.41 IC1.42 IC1.43 IC1.44 IC1.45 IC1.46 IC1.47 IC1.48 IC1.49 IC1.50 IC1.51 IC1.52 IC1.53 IC1.54 IC1.55 IC1.56 IC1.57 IC1.58 IC1.59 IC1.60 IC1.61 IC1.IC1 IC4.3 IC4.9 J1.2 nRST.2 pad.MHTR7 POT1.1 R1.1 R2.2 R3.2@3294.41,4250 R4.2 R5.2 R6.2 R10.1 R12.R14 R18.1 R20.1 R23.1 R_KS.1 RCC1.2 RCC2.2 SWITCH.1 TIA.4 USB-C1.1 USB-C1.2 USB-C1.3 USB-C1.4 USB-C1.A1-B12 USB-C1.B1-A12
ILIM: IC1.12@3537.09,4279.53 R1.2
IO0: IC1.12@2766.02,4479.33
IO1: IC1.13@2797.52,4479.33
IO2: IC1.5@2722.72,4703.74
IO3: IC1.6@2722.72,4672.24
IO4: IC1.18
IO5: IC1.7@3489.84,4192.91 IC1.19 R3.1@3960,4245 R10.2@2925,4401.64
IO10: CP1.1 IC1.16@2892.01,4479.33 R15.R15 R_HYS.2
ISET: IC1.16@3450.47,4307.09 R4.R4
L1: IC4.4 L1.1
L2: IC4.2 L1.2
NetLED1_1: PGOOD.1 R3.2@4013.28,4245
NetLED2_1: LED2.1 R20.2
NetLED3_1: LED3.1 R10.2@2126.64,4370
NetLED4_1: CHG.1 R7.2@4016.64,4120
NetLED5_1: 3V3.1 R18.2
NetLED6_1: R23.2 USB.1
NetR8_1: BOOT.3 R8.1
PS: C6.C6 IC4.7 IC4.8 R7.1@3240,3809.25
PWR_EN: IC4.6 R_KS.2 SWITCH.2
TD: IC1.15@3470.16,4307.09 R3.1@3345.59,4250
TEMP_SENSE: C.2 IC1.1@3422.91,4279.53 R5.1 R6.R6
TIA_N: C15.1 D1.2 D2.2 D3.2 Rf1.1 TIA.2
TIA_OUT: C15.2 R14.R14 Rf1.2 TIA.6
TIA_P: C6.2@2091.38,3135 R12.1 R13.1 TIA.3
TMR: IC1.14@3489.84,4307.09 R2.1
USB_D_N: IC1.3@3812.6,4704.21 IC1.4@3812.6,4605.79 IC1.26 USB-C1.A7 USB-C1.B7
USB_D_P: IC1.1@3887.4,4704.21 IC1.6@3887.4,4605.79 IC1.27 USB-C1.A6 USB-C1.B6
V_SYS: C3.1 C5.1 IC1.5@3450.47,4192.91 IC1.10@3537.09,4240.16 IC1.11@3537.09,4259.84 IC4.5 R7.2@3240,3840.75 SWITCH.3
V_THRES: C10.1 CP1.2 POT1.2
VBAT+: C4.1 C.1 IC1.2@3422.91,4259.84 IC1.3@3422.91,4240.16 J1.1
pads on no net: BOOT.1 CP1.7 IC1.2@2722.72,4798.23 IC1.4@2722.72,4735.24 IC1.7@2722.72,4640.75 IC1.9@2722.72,4577.76 IC1.10@2722.72,4546.26 IC1.11@2722.72,4514.76 IC1.15@2860.51,4479.33 IC1.17 IC1.30 IC1.31 IC4.11 IC4.12 IC4.13 IC4.14 IC4.15 nRST.1 nRST.3 SWITCH.4 SWITCH.5 SWITCH.6 TIA.1 TIA.5 TIA.8 USB-C1.A8 USB-C1.B8

## Silkscreen, mask and mechanical layers (free items; w line width, h text height)
Top Overlay:
  drawing of 24 lines, arcs and shapes, not listed
  text "DEBUG2" at 1772,4267 h40
  text "DEBUG1" at 2067,4267 h40
  text "+" at 4215,3945 h60 r90
  text "-" at 4205,3919.99 h60 r180
  text "+" at 4215,3720 h60 r90
  text "TEMP" at 4198,3532 h30 r90
  text "-" at 4205,3499.99 h60 r180
  text "ON/OFF" at 3675,2840 h60

## Text inside footprints (layer, text, board x,y; h text height)
C11: Top Overlay "+" at 2364.68,4810.87 h48 r90